# Altium PCB PCB1.pcbdoc (part 1 of 2)
Units mm, origin at the board's own origin, x right, y up, seen from the top; angles counter-clockwise.
Board outline 133.86 x 88.2 mm, 2 copper layers (Top Layer, Bottom Layer), stack 0.07 mm thick; 75 components, 73 nets, 338 pads, 350 vias.
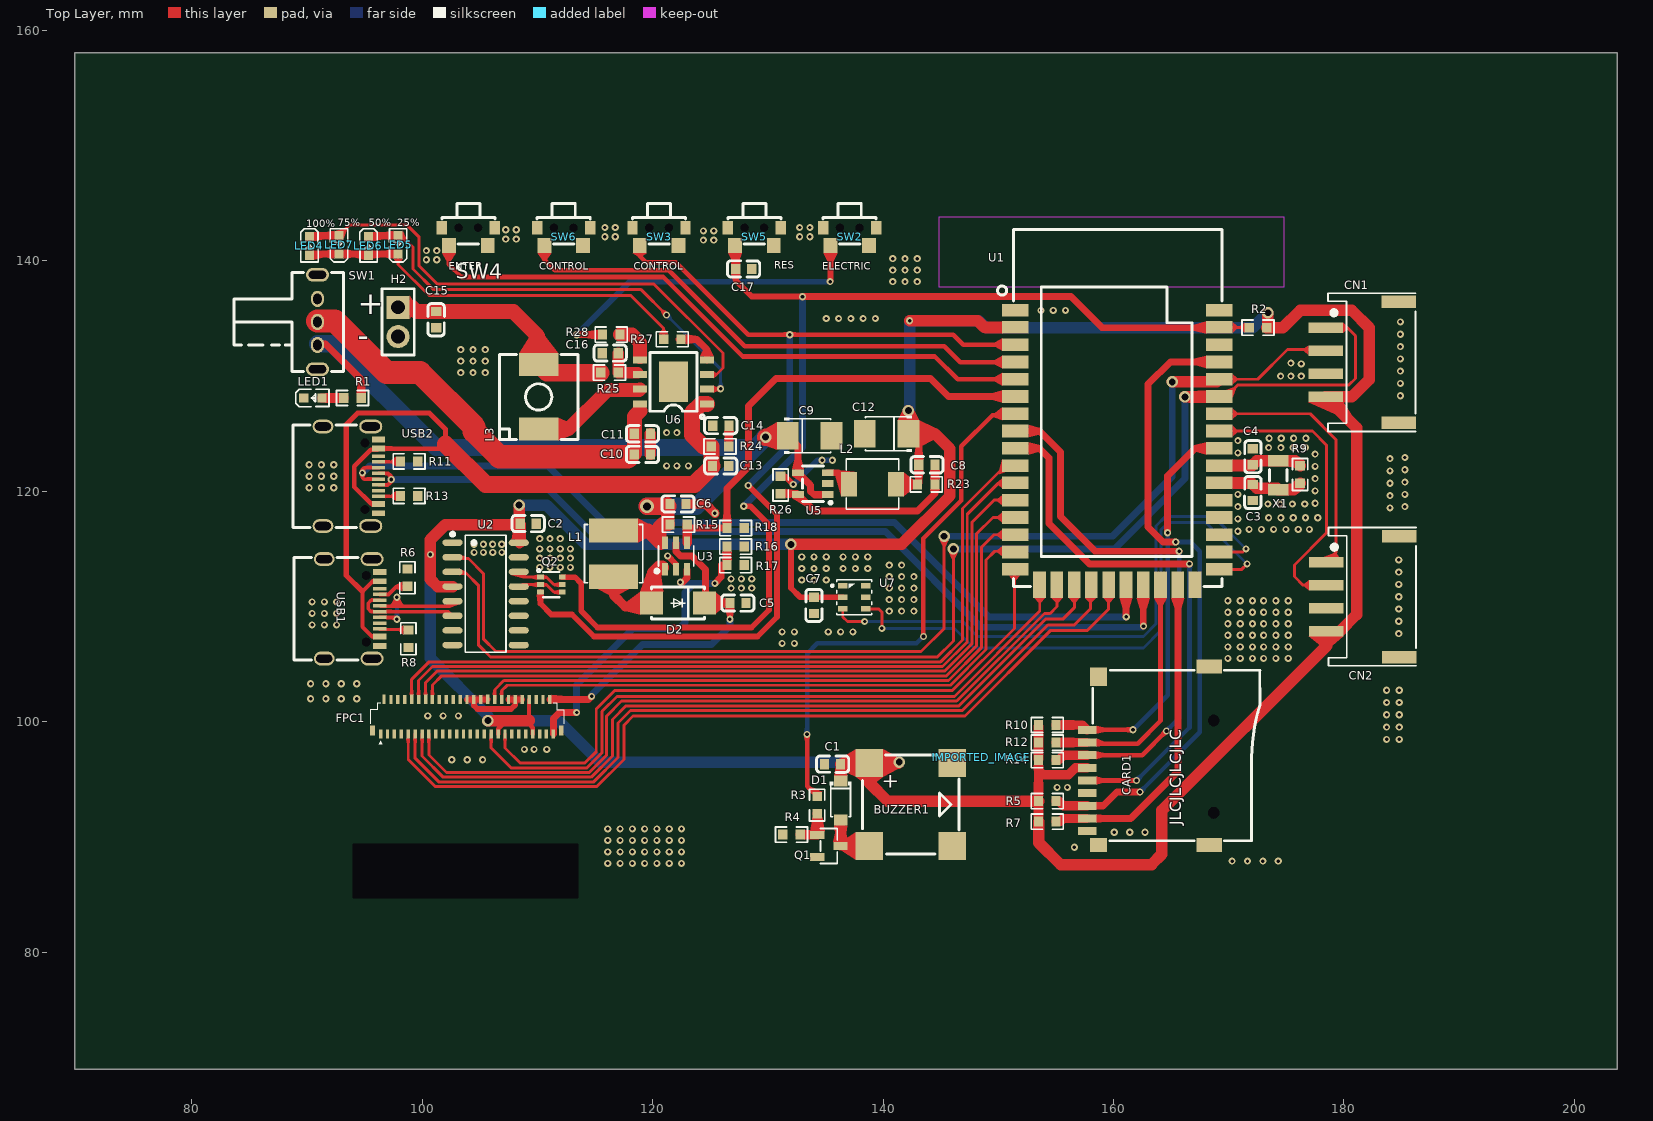
[diagram p0: Top Layer view]
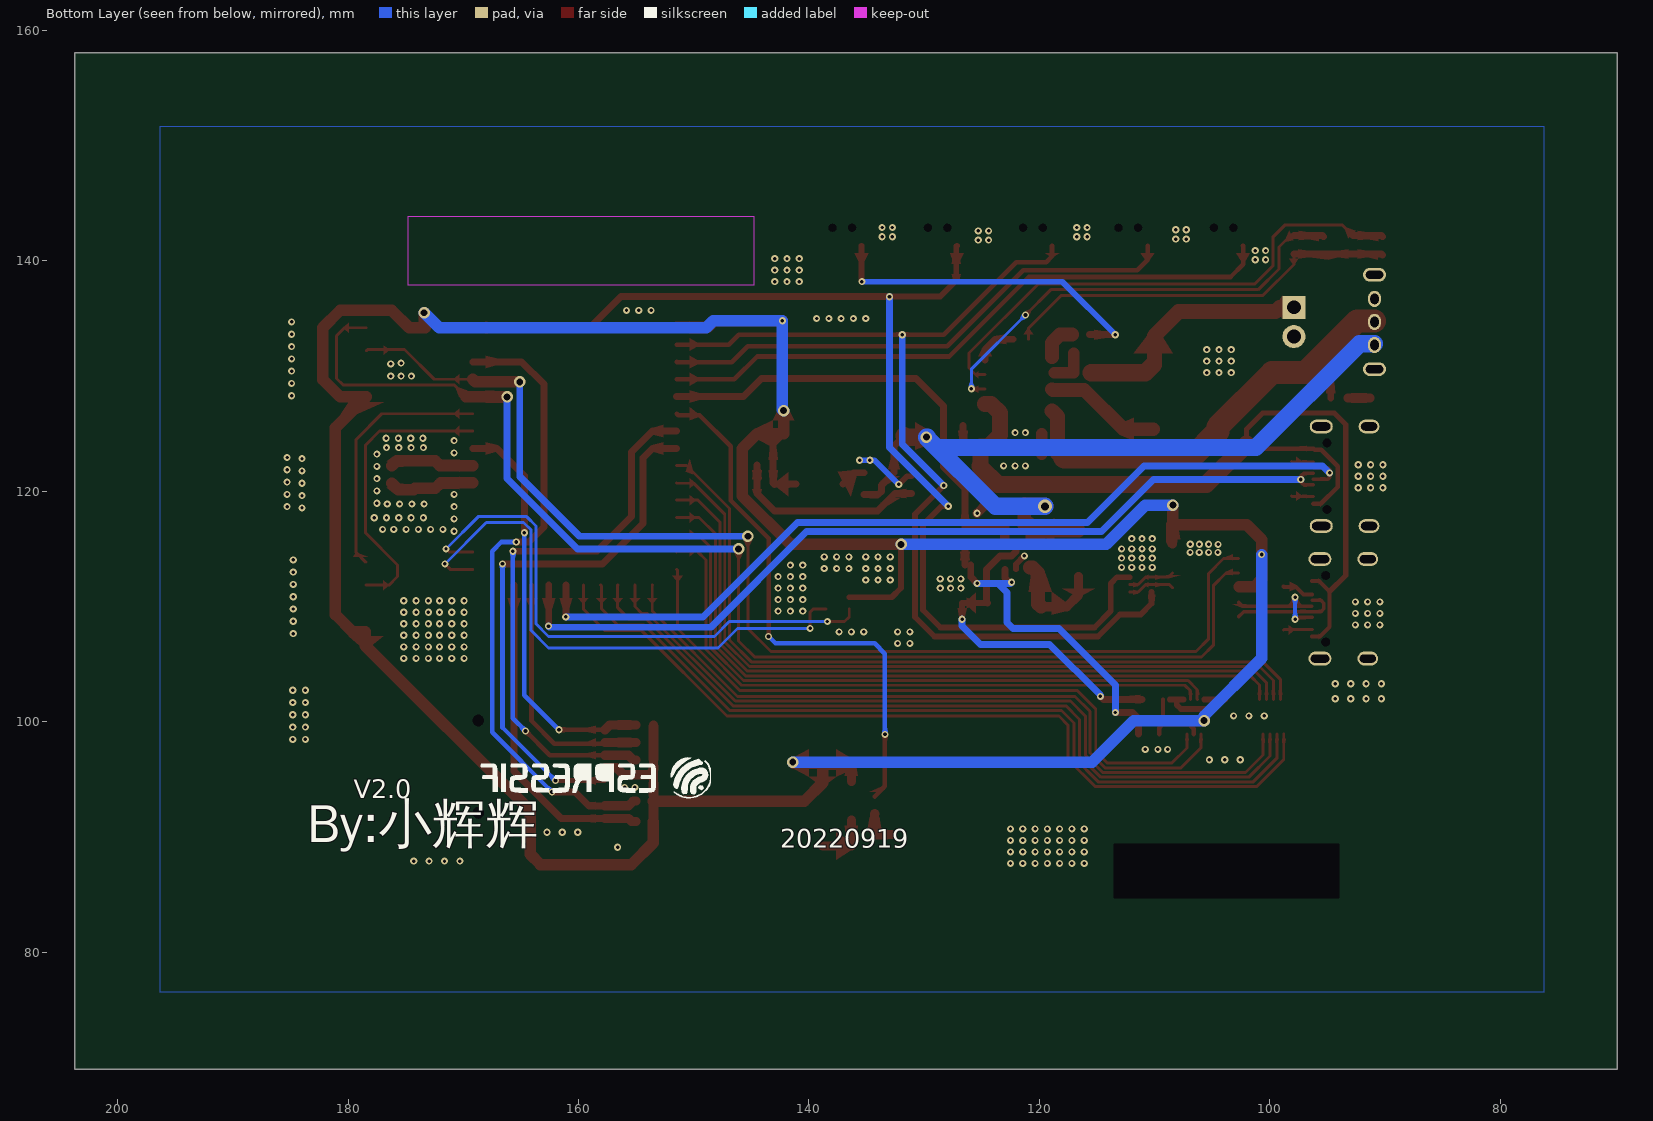
[diagram p1: Bottom Layer view, seen from below]

## Layer stack, top to bottom
Top Layer: signal copper 0.035
Bottom Layer: signal copper 0.035

## Board outline
203.707,69.85 69.85,69.85 69.85,158.049 203.707,158.049
cut-out: 93.973,84.689 113.531,84.689 113.531,89.388 93.973,89.388

## Components (designator, comment, footprint, x,y, rotation, side; value= is the part's Value field where it differs from the comment)
BUZZER1 "MLT-8530" BUZ-SMD_4P-L8.5-W8.5-P8.50-TL 142.403,92.811 r0 top
C1 "CL10A105KO8NNNC" C0603 135.613,96.322 r180 top
C2 "CAP_0603" C0603 109.199,117.2 r0 top
C3 "CAP_0603" C0603 172.099,119.9 r90 top
C4 "CAP_0603" C0603 172.099,123 r270 top
C5 "CL10A105KO8NNNC" C0603 127.399,110.3 r0 top
C6 "CL10A105KO8NNNC" C0603 122.199,118.9 r0 top
C7 "CAP_0603" C0603 133.999,110.1 r90 top
C8 "cc0603jrnpo9bn220" C0603 143.799,122.3 r180 top
C9 "TAJB226K016RNJ" CAP-SMD_L3.5-W2.8-R-RD 133.621,124.816 r180 top
C10 "CL10A105KO8NNNC" C0603 119.099,123.2 r180 top
C11 "CL10A105KO8NNNC" C0603 119.101,124.993 r180 top
C12 "TAJB226K016RNJ" CAP-SMD_L3.5-W2.8-R-RD 140.299,125 r0 top
C13 "CL10A105KO8NNNC" C0603 125.899,122.2 r180 top
C14 "CL10A105KO8NNNC" C0603 125.914,125.7 r0 top
C15 "CL10A105KO8NNNC" C0603 101.199,134.9 r90 top
C16 "CL10A105KO8NNNC" C0603 116.317,132 r0 top
C17 "0603B104K500NT" C0603 127.899,139.3 r0 top
CARD1 "tf-115-bcp9" TF-SMD_TF-115-BCP9 163.005,97.047 r90 top
CN1 "PH-4P卧贴" CONN-SMD_PH2.0-4PWB 181.599,131.2 r270 top
CN2 "PH-4P卧贴" CONN-SMD_PH2.0-4PWB 181.638,110.851 r270 top
D1 "1N4148W" SOD-123_L2.8-W1.8-LS3.7-RD 136.313,93.147 r270 top
D2 "SS34" DO-214AC_L4.3-W2.7-LS5.3-RD 122.199,110.3 r180 top
FPC1 "FH26W-51S-0.3SHW(60)" FPC-SMD_FH26W-51S-0.3SHW-60 103.879,100.437 r0 top
H2 "HDR-F_2.54_1x2P" HDR-TH_2P-P2.54-V-F 97.899,134.7 r270 top
IMPORTED_IMAGE "IMPORTED_IMAGE" IMPORTED_IMAGE 148.499,96.9 r0 top
L1 "SWPA5040S220MT" IND-SMD_L5.0-W5.0 116.599,114.6 r270 top
L2 "SLO0420H2R2MTT" IND-SMD_L4.4-W4.2 139.082,120.625 r0 top
L3 "SPM6530T-1R0M120" IND-SMD_L7.1-W6.5-P5.60 110.101,128.193 r90 top
LED1 "LED_0603-R" LED0603-RD_BLUE 90.503,128.097 r0 top
LED4 "100%" LED0603-RD_BLUE 90.199,141.3 r270 top
LED5 "25%" LED0603-RD_BLUE 97.899,141.399 r90 top
LED6 "50%" LED0603-RD_BLUE 95.326,141.3 r270 top
LED7 "75%" LED0603-RD_BLUE 92.772,141.399 r90 top
Q1 "AO3400" SOT-23-3_L2.9-W1.3-P1.90-LS2.4-BR 135.297,89.21 r180 top
Q2 "UMH3N" SC-70-6_L2.2-W1.3-P0.65-LS2.1-BR 111.199,111.9 r180 top
R1 "Res_0603" R0603 93.946,128.1 r0 top
R2 "Res_0603" R0603 172.546,134.2 r0 top
R3 "RC0603FR-07100RL" R0603 134.281,92.757 r270 top
R4 "RC0603FR-0710KL_1" R0603 132.046,90.2 r0 top
R5 "0603waf1002t5e" R0603 154.251,93.11 r0 top
R6 "td03g5101bt" R0603 98.699,112.5 r270 top
R7 "0603waf1002t5e" R0603 154.251,91.332 r0 top
R8 "td03g5101bt" R0603 98.799,107.2 r90 top
R9 "0603WAJ0515T5E" R0603 176.199,121.453 r270 top
R10 "0603waf1002t5e" R0603 154.251,99.714 r0 top
R11 "td03g5101bt" R0603 98.852,122.6 r180 top
R12 "0603waf1002t5e" R0603 154.251,98.19 r0 top
R13 "td03g5101bt" R0603 98.852,119.6 r180 top
R14 "0603waf1002t5e" R0603 154.251,96.666 r0 top
R15 "RC0603FR-0710KL_1" R0603 122.246,117.1 r180 top
R16 "RC0603FR-0710KL_1" R0603 127.199,115.2 r180 top
R17 "RC0603FR-0710KL_1" R0603 127.199,113.6 r180 top
R18 "RC0603FR-0710KL_1" R0603 127.199,116.8 r180 top
R23 "rc0603fr-07100kl" R0603 143.743,120.6 r0 top
R24 "0603waf1002t5e" R0603 125.843,123.9 r180 top
R25 "0603waf1002t5e" R0603 116.246,130.3 r0 top
R26 "0603waf2212t5e" R0603 131.099,120.553 r270 top
R27 "0603waf1002t5e" R0603 121.699,133.2 r180 top
R28 "0603waf1002t5e" R0603 116.399,133.6 r180 top
SW1 "SK-12D02-VG5" SW-TH_SK-12D02-VG5 90.899,134.699 r270 top
SW2 "TS24CA" SW-SMD_TS24CA 137.099,142.1 r0 top
SW3 "TS24CA" SW-SMD_TS24CA 120.549,142.1 r0 top
SW4 "TS24CA" SW-SMD_TS24CA 103.999,142.1 r0 top
SW5 "TS24CA" SW-SMD_TS24CA 128.824,142.1 r0 top
SW6 "TS24CA" SW-SMD_TS24CA 112.274,142.1 r0 top
U1 "ESP-S3-12K" WIFIM-SMD_42P-L31.0-W18.0-P1.50 160.33,123.805 r0 top
U2 "CH340C" SOP-16_L10.0-W3.9-P1.27-LS6.0-BL 105.499,111.1 r270 top
U3 "RY3730" SOT-23-6_L2.9-W1.6-P0.95-LS2.8-BL 122.032,114.374 r0 top
U5 "sy8088aac" SOT-23-5_L3.0-W1.7-P0.95-LS2.8-BR 133.911,120.663 r0 top
U6 "IP5306" ESOP-8_L4.9-W3.9-P1.27-LS6.0-BL-EP 121.799,129.5 r90 top
U7 "AHT20" SENSOR-SMD_L3.0-W3.0-P1.00-BR 137.499,110.8 r180 top
USB1 "TYPE-C-2.0-16PIN-SMT-3" TYPE-C-SMD_TYPE-CF3.1 93.899,109.8 r270 top
USB2 "TYPE-C-2.0-16PIN-SMT-3" TYPE-C-SMD_TYPE-CF3.1 93.787,121.307 r270 top
X1 "Q13FC1350000400" FC-135R_L3.2-W1.5 174.299,121.4 r270 top

## Footprints (in the part's own frame and the unit in brackets; to place one, negate y for a bottom-side part, rotate by r counter-clockwise, add the part's x,y. Pads: shape width x height; smd on the part's side, far side on the other; paste and mask are expansions set on the pad)
BUZ-SMD_4P-L8.5-W8.5-P8.50-TL [mm]
  rect 2.4x2.4 smd: 1(-3.6,3.6) 2(-3.6,-3.6) 3(3.6,-3.6) 4(3.6,3.6)
  silkscreen extent -4.2,-4.3 4.2,4.3
C0603 [mm]
  rect 0.8x0.9 smd: 1(-0.7,0) 2(0.7,0)
  silkscreen extent -1.41,-0.71 1.39,0.72
CAP-SMD_L3.5-W2.8-R-RD [mil]
  rect 74.8x93.5 smd: 1(74.8,0) 2(-74.7,0)
  silkscreen extent -72,-61 87,61
CONN-SMD_PH2.0-4PWB [mm]
  rect 0.899x3 smd: 1(-3,-3.175) 2(-1.001,-3.175) 3(1.001,-3.175) 4(3,-3.175)
  rect 1.1x3 smd: 5(5.25,3.175) 6(-5.25,3.175)
  silkscreen extent -6,-2.98 6,4.62
DO-214AC_L4.3-W2.7-LS5.3-RD [mil]
  rect 78.7x78.7 smd: 1(-90.5,0) 2(90.6,0)
  silkscreen extent -90,-55 91,55
ESOP-8_L4.9-W3.9-P1.27-LS6.0-BL-EP [mm]
  rect 0.6x1.2 smd: 1(-1.905,-2.908) 2(-0.635,-2.908) 3(0.635,-2.908) 4(1.905,-2.908) 5(1.905,2.908) 6(0.635,2.908) 7(-0.635,2.908) 8(-1.905,2.908)
  rect 3.5x2.5 smd: 9(0,0)
  silkscreen extent -3.2,-2.67 2.55,2.05
FC-135R_L3.2-W1.5 [mm]
  rect 1.001x1.801 smd: 1(-1.25,0) 2(1.25,0)
  silkscreen extent -0.51,-0.76 0.51,0.76
FPC-SMD_FH26W-51S-0.3SHW-60 [mil]
  rect 11.8x31.5 smd: 1(-295.3,-59.1) 2(-283.6,59.2) 3(-271.7,-59.2) 4(-259.8,59.1) 5(-248.1,-59.1) 6(-236.2,59.1) 7(-224.5,-59.1) 8(-212.6,59.1) 9(-200.9,-59.1) 10(-189,59.2) 11(-177.2,-59.1) 12(-165.3,59.1) 13(-153.6,-59.1) 14(-141.7,59.2) 15(-130,-59.2) 16(-118.1,59.1) 17(-106.4,-59.1) 18(-94.5,59.1) 19(-82.8,-59.2) 20(-70.8,59.1) 21(-59.2,-59.1) 22(-47.2,59.1) 23(-35.5,-59.1) 24(-23.6,59.1) 25(-11.9,-59.1) 26(0,59.1) 27(11.7,-59.1) 28(23.7,59.1) 29(35.4,-59.1) 30(47.3,59.1) 31(59,-59.1) 32(70.9,59.2) 33(82.6,-59.1) 34(94.5,59.1) 35(106.2,-59.1) 36(118.1,59.1) 37(129.8,-59.1) 38(141.8,59.1) 39(153.5,-59.1) 40(165.3,59.1) 41(177.2,-59.1) 42(189,59.1) 43(200.8,-59.1) 44(212.6,59.1) 45(224.4,-59.1) 46(236.2,59.1) 47(248,-59.1) 48(259.8,59.1) 49(271.6,-59.1) 50(283.5,59.1) 51(295.3,-59.1)
  rect 15.7x35.4 smd: 52(322.8,-47.1) 53(-322.8,-47.1)
  silkscreen extent -331,-94 331,47
HDR-TH_2P-P2.54-V-F [mm]
  rect 1.999x1.999 hole 1.199: 1(-1.27,0)
  round 1.999 hole 1.199: 2(1.27,0)
  silkscreen extent -2.88,-1.39 2.88,1.4
IMPORTED_IMAGE [mm]
IND-SMD_L4.4-W4.2 [mil]
  rect 55.1x83.5 smd: 1(79.8,0) 2(-79.8,0)
  silkscreen extent -90,-86 90,86
IND-SMD_L5.0-W5.0 [mm]
  rect 2.123x4.219 smd: 1(1.999,0) 2(-1.999,0)
  silkscreen extent -2.53,-2.53 2.53,2.53
IND-SMD_L7.1-W6.5-P5.60 [mm]
  rect 1.999x3.401 smd: 1(-2.799,0) 2(2.799,0)
  silkscreen extent -3.7,-3.4 3.7,3.4
LED0603-RD_BLUE [mil]
  rect 31.5x31.5 smd: 1(-31.5,-0.1) 2(31.5,0.1)
  silkscreen extent -59,-29 55,30
R0603 [mm]
  rect 0.806x0.864 smd: 1(-0.753,0) 2(0.753,0)
  silkscreen extent -1.39,-0.66 1.39,0.66
SC-70-6_L2.2-W1.3-P0.65-LS2.1-BR [mm]
  rect 0.6x0.42 smd: 1(0.95,-0.65) 2(0.95,0) 3(0.95,0.65) 4(-0.95,0.65) 5(-0.95,0) 6(-0.95,-0.65)
  silkscreen extent -0.7,-1.34 1.22,1.1
SENSOR-SMD_L3.0-W3.0-P1.00-BR [mm]
  rect 0.8x0.5 smd: 1(1,-1) 2(1,0) 3(1,1) 4(-1,1) 5(-1,0) 6(-1,-1)
  silkscreen extent -1.52,-1.52 2,1.52
SOD-123_L2.8-W1.8-LS3.7-RD [mm]
  rect 0.95x1.15 smd: 1(-1.692,0) 2(1.692,0)
  silkscreen extent -1.63,-0.94 1.41,0.94
SOP-16_L10.0-W3.9-P1.27-LS6.0-BL [mm]
  oval 0.56x1.745 smd: 1(-4.445,-2.872) 2(-3.175,-2.872) 3(-1.905,-2.872) 4(-0.635,-2.872) 5(0.635,-2.872) 6(1.905,-2.872) 7(3.175,-2.872) 8(4.445,-2.872) 9(4.445,2.872) 10(3.175,2.872) 11(1.905,2.872) 12(0.635,2.872) 13(-0.635,2.872) 14(-1.905,2.872) 15(-3.175,2.872) 16(-4.445,2.872)
  silkscreen extent -5.33,-3.02 5.08,1.77
SOT-23-3_L2.9-W1.3-P1.90-LS2.4-BR [mm]
  rect 1.25x0.7 smd: 1(1,-0.95) 2(1,0.95) 3(-1,0)
  silkscreen extent -0.73,-1.53 0.73,1.53
SOT-23-5_L3.0-W1.7-P0.95-LS2.8-BR [mm]
  rect 1x0.6 smd: 1(1.3,-0.95) 2(1.3,0) 3(1.3,0.95) 4(-1.3,0.95) 5(-1.3,-0.95)
  silkscreen extent -0.9,-1.78 1.65,1.55
SOT-23-6_L2.9-W1.6-P0.95-LS2.8-BL [mm]
  rect 0.532x1.072 smd: 1(-0.95,-1.149) 2(0,-1.149) 3(0.95,-1.149) 4(0.95,1.149) 5(0,1.149) 6(-0.95,1.149)
  silkscreen extent -1.82,-1.45 1.54,0.89
SW-SMD_TS24CA [mil]
  rect 35.4x47.2 smd: 1(-90.5,30.5) 2(90.6,30.5)
  rect 47.2x51.2 smd: 3(-65.9,-30.5) 4(66,-30.5)
  Multi-Layer board cut-out: -19.7,30.5 -21.07,36.49 -24.9,41.29 -30.43,43.95 -36.57,43.95 -42.1,41.29 -45.93,36.49 -47.3,30.5 -47.3,30.5 -45.93,24.51 -42.1,19.71 -36.57,17.05 -30.43,17.05 -24.9,19.71 -21.07,24.51 -19.7,30.5
  Multi-Layer board cut-out: 47.3,30.5 45.93,36.49 42.1,41.29 36.57,43.95 30.43,43.95 24.9,41.29 21.07,36.49 19.7,30.5 19.7,30.5 21.07,24.51 24.9,19.71 30.43,17.05 36.57,17.05 42.1,19.71 45.93,24.51 47.3,30.5
  silkscreen extent -91,-25 91,113
SW-TH_SK-12D02-VG5 [mm]
  oval 1.4x1.1 hole 0.701 slot 0.899 at 0 deg: 1(-1.999,0) 2(0,0) 3(1.999,0)
  oval 1.199x1.999 hole 0.701 slot 1.501 at 90 deg: 4(4.1,0) 5(-4.1,0)
  silkscreen extent -4.3,-7.25 4.3,2.27
TF-SMD_TF-115-BCP9 [mil]
  rect 27.6x63 smd: 1(88.6,208.7) 2(45.3,208.7) 3(2,208.7) 4(-41.3,208.7) 5(-84.6,208.7) 6(-128,208.7) 7(-171.3,208.7) 8(-214.6,208.7) 9(-257.9,208.7)
  rect 47.2x59.1 smd: 10(-305.1,169.3)
  rect 47.2x86.6 smd: 11(-305.1,-208.7) 13(305.1,-208.7)
  rect 63x59.1 smd: 12(269.7,169.3)
  Multi-Layer board cut-out: -194.9,-244.1 -186.35,-242.15 -179.5,-236.68 -175.69,-228.78 -175.69,-220.02 -179.5,-212.12 -186.35,-206.65 -194.9,-204.7 -194.9,-204.7 -203.45,-206.65 -210.3,-212.12 -214.11,-220.02 -214.11,-228.78 -210.3,-236.68 -203.45,-242.15 -194.9,-244.1
  Multi-Layer board cut-out: 120.1,-244.1 128.65,-242.15 135.5,-236.68 139.31,-228.78 139.31,-220.02 135.5,-212.12 128.65,-206.65 120.1,-204.7 120.1,-204.7 111.55,-206.65 104.7,-212.12 100.89,-220.02 100.89,-228.78 104.7,-236.68 111.55,-242.15 120.1,-244.1
  silkscreen extent -291,-382 292,189
TYPE-C-SMD_TYPE-CF3.1 [mm]
  oval 1.2x2 hole 0.7 slot 1.6 at 90 deg: 1(-4.32,1.737) 1(4.32,1.737)
  oval 1.2x1.8 hole 0.7 slot 1.4 at 90 deg: 1(-4.32,-2.413) 1(4.32,-2.413)
  rect 0.5x1.15 smd: A1(-3.2,2.413) A2(-2.4,2.413) A11(2.4,2.413) A12(3.218,2.413)
  rect 0.3x1.15 smd: A3(-1.75,2.413) A4(-1.25,2.413) A5(-0.75,2.413) A6(-0.25,2.413) A7(0.25,2.413) A8(0.75,2.413) A9(1.25,2.413) A10(1.75,2.413)
  Multi-Layer board cut-out: 2.89,1.612 2.727,1.575 2.597,1.471 2.524,1.321 2.524,1.154 2.597,1.004 2.727,0.899 2.89,0.862 2.89,0.862 3.053,0.899 3.183,1.004 3.256,1.154 3.256,1.321 3.183,1.471 3.053,1.575 2.89,1.612
  Multi-Layer board cut-out: -2.89,1.612 -3.053,1.575 -3.183,1.471 -3.256,1.321 -3.256,1.154 -3.183,1.004 -3.053,0.899 -2.89,0.862 -2.89,0.862 -2.727,0.899 -2.597,1.004 -2.524,1.154 -2.524,1.321 -2.597,1.471 -2.727,1.575 -2.89,1.612
  silkscreen extent -4.44,-5.03 4.45,0.52
WIFIM-SMD_42P-L31.0-W18.0-P1.50 [mm]
  rect 2.3x1.1 smd: 1(-8.85,11.925) 2(-8.85,10.425) 3(-8.85,8.925) 4(-8.85,7.425) 5(-8.85,5.925) 6(-8.85,4.425) 7(-8.85,2.925) 8(-8.85,1.425) 9(-8.85,-0.075) 10(-8.85,-1.575) 11(-8.85,-3.075) 12(-8.85,-4.575) 13(-8.85,-6.075) 14(-8.85,-7.575) 15(-8.85,-9.075) 16(-8.85,-10.575) 27(8.85,-10.575) 28(8.85,-9.075) 29(8.85,-7.575) 30(8.85,-6.075) 31(8.85,-4.575) 32(8.85,-3.075) 33(8.85,-1.575) 34(8.85,-0.075) 35(8.85,1.425) 36(8.85,2.925) 37(8.85,4.425) 38(8.85,5.925) 39(8.85,7.425) 40(8.85,8.925) 41(8.85,10.425) 42(8.85,11.925)
  rect 1.1x2.3 smd: 17(-6.75,-11.925) 18(-5.25,-11.925) 19(-3.75,-11.925) 20(-2.25,-11.925) 21(-0.75,-11.925) 22(0.75,-11.925) 23(2.25,-11.925) 24(3.75,-11.925) 25(5.25,-11.925) 26(6.75,-11.925)
  silkscreen extent -10.4,-12.08 9.1,18.93

## Via types
v1: diameter 0.62, hole 0.3, Top Layer to Bottom Layer, 295 vias
v2: diameter 0.62, hole 0.32, Top Layer to Bottom Layer, 15 vias
v3: diameter 0.63, hole 0.3, Top Layer to Bottom Layer, 14 vias
v4: diameter 0.63, hole 0.32, Top Layer to Bottom Layer, 12 vias
v5: diameter 1, hole 0.6, Top Layer to Bottom Layer, 11 vias
v6: diameter 0.62, hole 0.305, Top Layer to Bottom Layer, 2 vias
v7: diameter 1.2, hole 0.7, Top Layer to Bottom Layer, 1 vias

## Nets (pads, with @x,y where several pads share a name; then routed paths per layer and width w, separated by ;. In a path a pad name is that pad's centre, name@x,y a point inside that pad or via, vN(x,y) a via of type N, cw(c..) or ccw(c..) an arc to the next point about the centre after c; other vN are vias at no path point)
$1N5106: LED1.2 R1.1 | length 1.9
  Top Layer w0.8: LED1.2@91.303,128.1 R1.1@93.192,128.1
$1N25025: Q1.1 R3.2 R4.2 | length 3.4
  Top Layer w0.8: R4.2@132.799,90.2 134.257,90.2 Q1.1@134.297,90.16 134.297,91.988 R3.2@134.281,92.004
$1N25027: BUZZER1.2 D1.2 Q1.3 | length 4.8
  Top Layer w0.8: D1.2@136.313,91.454 136.313,89.226 Q1.3@136.297,89.21 BUZZER1.2@138.803,89.211
$1N31228: D2.2 L1.1 U3.1 | length 9.2
  Top Layer w0.8: L1.1@116.599,112.601 116.599,111 117.615,109.984 D2.2@119.864,109.984
  Top Layer w1.2: D2.2@119.864,109.984 120.099,110.218 120.099,112.9 120.599,113.4 120.799,113.4
$1N88053: C14.2 R24.1 | length 1.8
  Top Layer w0.6: R24.1@126.597,123.9 126.615,123.918 C14.2@126.615,125.7
$1N92749: LED4.2 LED5.1 LED6.2 LED7.1 R27.2 | length 34.9
  Top Layer w0.254: LED5.1@97.902,140.599 97.902,139.697 100.599,137 118.099,137 120.946,134.153 R27.2@120.946,133.2
  Top Layer w0.6: LED4.2@90.202,140.5 90.301,140.599 LED7.1@92.775,140.599 LED5.1@97.902,140.599
$1N103155: LED5.2 LED6.1 U6.2 | length 39.4
  Top Layer w0.254: LED5.2@97.896,142.199 98.2,142.199 99.199,141.2 99.199,139.3 100.999,137.5 118.999,137.5 v2(121.199,135.3) ; U6.2@124.707,128.865 125.864,128.865 v2(125.899,128.9)
  Top Layer w0.6: LED6.1@95.323,142.1 95.422,142.199 LED5.2@97.896,142.199
  Bottom Layer w0.254: v2(121.199,135.3) 125.899,130.6 v2(125.899,128.9)
$1N106824: R27.1 U6.4 | length 3.7
  Top Layer w0.6: R27.1@122.299,133.2 123.799,133.2 124.707,132.291 U6.4@124.707,131.405
$1N108049: LED4.1 LED7.2 U6.3 | length 45.3
  Top Layer w0.254: LED7.2@92.77,142.199 93.671,143.1 98.699,143.1 99.699,142.1 99.699,139.6 101.293,138.006 120.093,138.006 126.099,132 126.099,130.7 125.534,130.135 U6.3@124.707,130.135
  Top Layer w0.6: LED4.1@90.196,142.1 90.295,142.199 LED7.2@92.77,142.199
$1N108197: R28.1 U6.5 | length 3.3
  Top Layer w1.2: R28.1@117.152,133.6 118.199,133.6 118.899,132.9 U6.5@118.899,131.64
$1N108835: R28.2 SW2.3 | length 29.3
  Top Layer w0.5: v1(135.399,138.2) 135.425,138.226 SW2.3@135.425,141.325
  Top Layer w0.6: v4(113.399,133.6) R28.2@115.646,133.6
  Bottom Layer w0.5: v4(113.399,133.6) 117.999,138.2 v1(135.399,138.2)
$1N110867: C16.2 R25.2 U6.6 | length 3.4
  Top Layer w1: C16.2@117.017,132 117.017,130.318 R25.2@116.999,130.3 U6.6@118.719,130.3
$1N120907: L3.1 U6.7 | length 10.2
  Top Layer w1.2: L3.1@110.101,125.394 112.693,125.394 116.099,128.8 118.826,128.8 U6.7@118.891,128.865
ACC1: R6.2 USB1.A4 | length 2.8
  Top Layer w0.35: USB1.A4@96.312,111.05 97.049,111.05 97.699,111.7 98.752,111.7 R6.2@98.799,111.746
ACC2: R8.2 USB1.A10 | length 2.5
  Top Layer w0.254: USB1.A10@96.287,107.996 98.756,107.996 R8.2@98.799,107.953
BAT+: C15.2 H2.1 L3.2 R25.1 | length 21.2
  Top Layer w1.3: H2.1@97.899,135.97 99.129,135.97 99.499,135.6 C15.2@101.199,135.6 107.899,135.6 109.999,133.5 L3.2@109.999,131.094
  Top Layer w1.5: L3.2@110.101,130.992 110.793,130.3 R25.1@115.492,130.3
BAT_5V: C10.2 C11.2 SW1.2 U6.8 | length 35.9
  Top Layer w1.3: C10.2@118.401,123.293 C11.2@118.401,124.993 118.401,126.501 118.891,126.991
  Top Layer w2: SW1.2@90.899,134.8 92.399,134.8 96.899,130.3 99.799,130.3 104.499,125.6 104.499,125.2 106.699,123 117.799,123
BCC1: R11.2 USB2.A4 | length 1.9
  Top Layer w0.254: USB2.A4@96.199,122.557 98.057,122.557 R11.2@98.099,122.6
BCC2: R13.2 USB2.A10 | length 1.9
  Top Layer w0.254: USB2.A10@96.199,119.557 98.057,119.557 R13.2@98.099,119.6
BUZZER: R3.1 U1.7 | length 47.2
  Top Layer w0.4: v2(133.399,98.9) 133.399,94.392 R3.1@134.281,93.51 ; v2(143.499,107.4) 143.499,115.9 146.799,119.2 146.799,123.9 149.499,126.6 151.35,126.6 U1.7@151.48,126.73
  Bottom Layer w0.4: v2(133.399,98.9) 133.399,105.9 134.299,106.8 142.899,106.8 v2(143.499,107.4)
CSX: FPC1.34 U1.14 | length 56.7
  Top Layer w0.254: FPC1.34@106.279,101.938 106.299,101.957 106.299,102.8 107.073,103.574 145.672,103.574 148.525,106.426 148.525,115.125 149.629,116.23 U1.14@151.48,116.23
D+: U1.23 USB2.A6 USB2.A8 | length 77.1
  Top Layer w0.3: USB2.A8@96.199,120.557 97.057,120.557 97.299,120.8 97.299,121.3 97.041,121.557 USB2.A6@96.199,121.557
  Top Layer w0.6: U1.23@162.58,111.88 162.58,108.319 v4(162.599,108.3)
  Bottom Layer w0.6: v2(97.299,121.027) 110.072,121.027 114.599,116.5 140.199,116.5 148.499,108.2 162.499,108.2 v4(162.599,108.3)
D-: U1.22 USB2.A5 USB2.A7 | length 78.4
  Top Layer w0.3: USB2.A7@96.199,121.057 94.942,121.057 94.799,121.2 v2(94.799,121.6) 94.799,121.9 94.956,122.057 USB2.A5@96.199,122.057
  Top Layer w0.6: U1.22@161.08,111.88 161.08,109.119 v4(161.099,109.1)
  Bottom Layer w0.6: v2(94.799,121.6) 95.399,122.2 110.899,122.2 115.799,117.3 140.999,117.3 149.199,109.1 v4(161.099,109.1)
DB0: FPC1.9 U1.21 | length 74.2
  Top Layer w0.254: FPC1.9@98.776,98.935 98.776,96.722 101.125,94.374 115.148,94.374 117.499,96.725 117.499,99.7 118.299,100.5 147.099,100.5 154.499,107.9 157.699,107.9 159.58,109.781 U1.21@159.58,111.88
DB1: FPC1.10 U1.10 | length 68.5
  Top Layer w0.254: FPC1.10@99.078,101.94 99.078,103.679 100.599,105.2 144.999,105.2 146.899,107.1 146.899,118.5 150.629,122.23 U1.10@151.48,122.23
DB2: FPC1.11 U1.20 | length 71.7
  Top Layer w0.254: FPC1.11@99.378,98.935 99.378,96.82 101.418,94.78 114.88,94.78 116.999,96.9 116.999,99.9 118.073,100.974 146.873,100.974 154.299,108.4 156.599,108.4 157.999,109.8 157.999,111.799 U1.20@158.08,111.88
DB3: FPC1.12 U1.11 | length 67
  Top Layer w0.254: FPC1.12@99.68,101.938 99.68,103.581 100.893,104.793 145.167,104.793 147.305,106.931 147.305,118.006 149.999,120.7 151.45,120.7 U1.11@151.48,120.73
DB4: FPC1.13 U1.19 | length 69.2
  Top Layer w0.254: FPC1.13@99.978,98.935 99.978,97.021 101.812,95.187 114.661,95.187 116.499,97.025 116.499,100.2 117.68,101.38 146.58,101.38 154.099,108.9 155.599,108.9 156.599,109.9 156.599,111.861 U1.19@156.58,111.88
DB5: FPC1.14 U1.12 | length 65.4
  Top Layer w0.254: FPC1.14@100.28,101.94 100.28,103.38 101.286,104.387 145.336,104.387 147.712,106.763 147.712,117.312 149.629,119.23 U1.12@151.48,119.23
DB6: FPC1.15 U1.18 | length 66.8
  Top Layer w0.254: FPC1.15@100.577,98.933 100.577,97.122 102.105,95.593 114.493,95.593 116.005,97.106 116.005,100.506 117.286,101.787 146.386,101.787 153.999,109.4 154.499,109.4 155.099,110 155.099,111.861 U1.18@155.08,111.88
DB7: FPC1.16 U1.13 | length 63.6
  Top Layer w0.254: FPC1.16@100.879,101.938 100.879,103.18 101.68,103.98 145.504,103.98 148.118,106.595 148.118,116.319 149.529,117.73 U1.13@151.48,117.73
DCX: FPC1.37 U1.16 | length 58.2
  Top Layer w0.254: FPC1.37@107.176,98.935 107.176,97.723 108.493,96.406 114.105,96.406 115.099,97.4 115.099,101.1 116.699,102.7 145.999,102.7 151.399,108.1 151.399,113.149 U1.16@151.48,113.23
DN: U2.6 USB1.A5 USB1.A7 | length 9.3
  Top Layer w0.3: USB1.A5@96.312,110.549 95.549,110.549 95.299,110.3 95.299,109.8 95.549,109.549 USB1.A7@96.312,109.549 102.249,109.549 102.704,109.095 U2.6@102.704,109.088
DP: U2.5 USB1.A6 USB1.A8 | length 12.1
  Top Layer w0.3: USB1.A8@96.312,109.05 97.649,109.05 v6(97.799,108.9) ; USB1.A6@96.333,110.041 97.308,110.041 ; v6(97.799,110.8) v6@97.799,110.551 ; U2.5@102.704,110.358 102.387,110.041 98.308,110.041 ; 97.308,110.041 v6@97.799,110.532 ; 97.308,110.041 97.793,110.041 ; 97.793,110.041 97.799,110.048 v6@97.799,110.532 ; 97.793,110.041 98.308,110.041 ; v6@97.799,110.532 v6@97.799,110.551 ; v6@97.799,110.551 98.308,110.041
  Bottom Layer w0.35: v6(97.799,108.9) v6(97.799,110.8)
DTR: Q2.2 Q2.4 U2.13 | length 4.1
  Top Layer w0.254: U2.13@108.448,111.628 108.72,111.9 Q2.2@110.249,111.9 110.767,111.9 111.417,111.25 Q2.4@112.149,111.25
EN: C17.1 Q2.6 R2.1 SW5.3 U1.41 | length 101.7
  Top Layer w0.254: U1.41@169.18,134.23 171.762,134.23 R2.1@171.792,134.2
  Top Layer w0.5: Q2.6@112.149,112.55 113.25,112.55 113.799,112 113.799,109.6 115.216,108.182 128.582,108.182 130.099,109.7 130.099,117.1 128.499,118.7 v4(127.899,118.7) ; SW5.3@127.15,141.325 127.199,141.276 C17.1@127.199,139.3 127.199,138.3 128.599,136.9 v4(132.999,136.9)
  Top Layer w0.6: v4(132.999,136.9) 156.299,136.9 158.999,134.2 169.15,134.2 U1.41@169.18,134.23
  Bottom Layer w0.6: v4(127.899,118.7) 132.999,123.8 v4(132.999,136.9)
FB: C8.1 R23.2 R26.2 U5.5 | length 17.1
  Top Layer w0.6: R26.2@131.099,119.8 132.524,119.8 U5.5@132.611,119.713 134.024,118.3 142.999,118.3 144.497,119.797 R23.2@144.497,120.6 144.499,120.602 C8.1@144.499,122.3
GND: BUZZER1.3 BUZZER1.4 C1.2 C2.2 C3.1 C4.1 C5.2 C6.2 C7.1 C9.2 C10.1 C11.1 C12.2 C13.1 C14.1 C15.1 C16.1 C17.2 CARD1.6 CARD1.10 CARD1.11 CARD1.12 CARD1.13 CN1.3 CN1.5 CN1.6 CN2.3 CN2.5 CN2.6 FPC1.3 FPC1.4 FPC1.5 FPC1.6 FPC1.7 FPC1.8 FPC1.17 FPC1.18 FPC1.19 FPC1.20 FPC1.21 FPC1.22 FPC1.23 FPC1.24 FPC1.25 FPC1.26 FPC1.27 FPC1.28 FPC1.29 FPC1.30 FPC1.31 FPC1.32 FPC1.38 FPC1.40 FPC1.41 FPC1.42 FPC1.43 FPC1.52 FPC1.53 H2.2 LED1.1 Q1.2 R4.1 R6.1 R8.1 R11.1 R13.1 R16.1 R17.1 R18.1 R26.1 SW2.4 SW3.1 SW3.2 SW3.4 SW4.1 SW4.2 SW4.4 SW5.1 SW5.2 SW5.4 SW6.1 SW6.2 SW6.4 U1.1 U1.26 U1.42 U2.1 U3.2 U5.2 U6.9 U7.5 USB1.1 USB1.A1 USB1.A12 USB2.1 USB2.A1 USB2.A12 | length 19.6
  Top Layer w0.5: FPC1.26@103.879,101.938 FPC1.28@104.481,101.938 ; FPC1.32@105.68,101.94 105.677,101.938 FPC1.30@105.08,101.938 FPC1.28@104.481,101.938 ; FPC1.38@107.481,101.938 FPC1.40@108.078,101.938 ; FPC1.42@108.68,101.938 FPC1.40@108.078,101.938 ; v1(121.299,114.4) 122.032,113.667 U3.2@122.032,113.225 ; R26.1@131.099,121.306 131.492,121.306 v1(132.199,120.6) ; FPC1.28@104.481,101.938 104.481,101.418 104.799,101.1 107.699,101.1 108.078,101.478 FPC1.40@108.078,101.938
  Top Layer w0.8: C6.2@122.899,118.9 124.599,118.9 v1(125.399,118.1)
  Top Layer w1: C10.1@119.801,123.201 C11.1@119.801,124.993
  Bottom Layer w0.5: v1(132.199,120.6) 134.299,122.7 v1(134.699,122.7) v1(135.599,122.7)
  other v1: 116.099,87.7 117.166,87.7 118.232,87.7 119.299,87.7 120.366,87.7 121.432,87.7 122.499,87.7 170.299,87.9 171.632,87.9 172.966,87.9 174.299,87.9 116.099,88.7 117.166,88.7 118.232,88.7 119.299,88.7 120.366,88.7 121.432,88.7 122.499,88.7 156.599,89.1 116.099,89.7 117.166,89.7 118.232,89.7 119.299,89.7 120.366,89.7 121.432,89.7 122.499,89.7 116.099,90.7 117.166,90.7 118.232,90.7 119.299,90.7 120.366,90.7 121.432,90.7 122.499,90.7 155.099,94.3 155.999,94.3 108.866,97.6 109.699,97.6 110.799,97.6 183.699,98.466 184.799,98.466 183.699,99.533 184.799,99.533 183.699,100.6 184.799,100.6 183.699,101.666 184.799,101.666 183.699,102.733 184.799,102.733 169.932,105.5 170.999,105.5 172.066,105.5 173.032,105.5 174.099,105.5 175.166,105.5 169.932,106.5 170.999,106.5 172.066,106.5 173.032,106.5 174.099,106.5 175.166,106.5 131.232,106.8 132.299,106.8 169.932,107.5 170.999,107.5 172.066,107.5 173.032,107.5 174.099,107.5 175.166,107.5 184.76,107.651 131.232,107.8 132.299,107.8 135.241,107.8 136.307,107.8 137.374,107.8 90.432,108.4 91.499,108.4 92.566,108.4 169.932,108.5 170.999,108.5 172.066,108.5 173.032,108.5 174.099,108.5 175.166,108.5 184.76,108.717 90.432,109.4 91.499,109.4 92.566,109.4 169.932,109.5 170.999,109.5 172.066,109.5 173.032,109.5 174.099,109.5 175.166,109.5 140.532,109.6 141.599,109.6 142.666,109.6 184.76,109.784 90.432,110.4 91.499,110.4 92.566,110.4 169.932,110.5 170.999,110.5 172.066,110.5 173.032,110.5 174.099,110.5 175.166,110.5 140.532,110.6 141.599,110.6 142.666,110.6 184.76,110.851 126.799,111.6 127.699,111.6 128.599,111.6 140.532,111.6 141.599,111.6 142.666,111.6 184.76,111.917 132.932,112.3 133.999,112.3 135.066,112.3 126.799,112.4 127.699,112.4 128.599,112.4 140.532,112.6 141.599,112.6 142.666,112.6 184.76,112.984 132.932,113.3 133.999,113.3 135.066,113.3 136.532,113.3 137.599,113.3 138.666,113.3 110.199,113.4 111.085,113.4 111.97,113.4 112.856,113.4 140.532,113.6 141.599,113.6 184.76,114.051 110.199,114.2 111.085,114.2 111.97,114.2 112.856,114.2 132.932,114.3 133.999,114.3 135.066,114.3 136.532,114.3 137.599,114.3 138.666,114.3 104.489,114.697 105.309,114.702 106.109,114.702 106.909,114.702 110.199,115 111.085,115 111.97,115 112.856,115 104.48,115.395 105.299,115.4 106.099,115.4 106.899,115.4 110.199,115.9 111.085,115.9 111.97,115.9 170.799,116.533 171.766,116.7 172.832,116.7 173.899,116.7 174.966,116.7 176.032,116.7 176.999,116.7 170.799,117.6 173.466,117.7 174.532,117.7 175.599,117.7 176.666,117.7 177.732,117.7 183.999,118.566 170.799,118.666 185.299,118.666 173.399,118.9 174.466,118.9 175.532,118.9 176.599,118.9 177.499,118.966 183.999,119.633 170.799,119.733 185.299,119.733 177.499,120.033 90.178,120.307 91.244,120.307 92.311,120.307 183.999,120.7 185.299,120.8 177.499,121.1 90.178,121.307 91.244,121.307 92.311,121.307 183.999,121.766 185.299,121.866 177.499,122.166 121.199,122.2 122.099,122.2 123.099,122.2 90.178,122.307 91.244,122.307 92.311,122.307 183.999,122.833 185.299,122.933 177.499,123.233 170.799,123.333 173.466,123.8 174.532,123.8 175.599,123.8 176.666,123.8 170.799,124.4 173.499,124.6 174.566,124.6 175.632,124.6 176.699,124.6 121.199,125.1 122.099,125.1 184.899,128.3 184.899,129.366 174.499,130 175.399,130 176.299,130 103.332,130.3 104.399,130.3 105.466,130.3 184.899,130.433 176.299,131.066 175.399,131.133 103.332,131.3 104.399,131.3 105.466,131.3 184.899,131.5 103.332,132.3 104.399,132.3 105.466,132.3 184.899,132.566 184.899,133.633 184.899,134.7 135.066,135 136.132,135 137.199,135 138.266,135 139.332,135 153.699,135.7 154.766,135.7 155.832,135.7 140.832,138.2 141.899,138.2 142.966,138.2 140.832,139.2 141.899,139.2 142.966,139.2 100.349,140.1 101.249,140.1 140.832,140.2 141.899,140.2 142.966,140.2 100.349,140.9 101.249,140.9 124.399,141.8 125.299,141.8 107.249,141.9 108.149,141.9 115.849,142.1 116.749,142.1 132.749,142.1 133.649,142.1 124.399,142.6 125.299,142.6 107.249,142.7 108.149,142.7 115.849,142.9 116.749,142.9 132.749,142.9 133.649,142.9
  other v3: 102.566,96.7 103.899,96.7 105.232,96.7 100.466,100.5 101.799,100.5 103.132,100.5 90.299,102 91.632,102 92.966,102 94.299,102 90.299,103.3 91.632,103.3 92.966,103.3 94.299,103.3
  other v4: 160.066,90.4 161.399,90.4 162.732,90.4
IO0: Q2.3 SW3.3 U1.3 | length 87.2
  Top Layer w0.4: SW3.3@118.875,141.325 118.899,141.301 118.899,140.4 119.399,139.9 121.999,139.9 128.299,133.6 v4(131.899,133.6) 146.099,133.6 146.969,132.73 U1.3@151.48,132.73
  Top Layer w0.5: Q2.3@110.249,111.25 110.249,110.25 111.199,109.3 112.999,109.3 114.899,107.4 129.099,107.4 130.799,109.1 130.799,118 v4(128.299,120.5)
  Bottom Layer w0.6: v4(128.299,120.5) 131.899,124.1 v4(131.899,133.6)
IO4: SW4.3 U1.5 | length 54.9
  Top Layer w0.4: SW4.3@102.325,141.325 102.299,141.299 102.299,139.7 103.399,138.6 120.899,138.6 127.799,131.7 144.499,131.7 146.469,129.73 U1.5@151.48,129.73
IO5: SW6.3 U1.4 | length 45.8
  Top Layer w0.4: SW6.3@110.599,141.324 110.599,140.1 111.499,139.2 121.399,139.2 127.999,132.6 145.299,132.6 146.699,131.2 151.45,131.2 U1.4@151.48,131.23
IO15: C3.2 R9.2 U1.32 X1.2 | length 7.5
  Top Layer w1: U1.32@169.18,120.73 171.969,120.73 C3.2@172.099,120.6 172.447,120.252 174.197,120.252 X1.2@174.299,120.15 175.649,120.15 R9.2@176.199,120.7
IO16: C4.2 R9.1 U1.33 X1.1 | length 7.2
  Top Layer w1: U1.33@169.18,122.23 172.029,122.23 C4.2@172.099,122.3 172.447,122.647 X1.1@174.097,122.647 ; X1.1@174.299,122.649 175.756,122.649 R9.1@176.199,122.206
IO41: CN2.2 U1.35 | length 25.5
  Top Layer w0.254: U1.35@169.18,125.23 177.269,125.23 178.499,124 178.499,116.4 175.699,113.6 175.699,112.6 176.447,111.851 CN2.2@178.463,111.851
IO42: CN2.1 U1.36 | length 22
  Top Layer w0.254: U1.36@169.18,126.73 177.069,126.73 179.299,124.5 179.299,114.686 CN2.1@178.463,113.85
LCD_BLK: R15.1 R18.2 U1.6 U3.4 | length 40.8
  Top Layer w0.6: R15.1@122.999,117.1 123.299,116.8 125.946,116.8 ; R18.2@126.446,116.8 126.446,120.246 128.299,122.1 128.299,127.4 130.699,129.8 144.099,129.8 145.669,128.23 U1.6@151.48,128.23
  Top Layer w0.8: U3.4@122.999,115.54 R15.1@122.999,117.1
LED_PWM: FPC1.1
LEDA: C5.1 D2.1 FPC1.50 U3.5 | length 29.4
  Top Layer w0.5: D2.1@124.498,110.3 C5.1@126.699,110.3 v4(126.699,108.9)
  Top Layer w0.6: FPC1.50@111.08,101.938 114.437,101.938 v1(114.699,102.2) ; U3.5@122.032,115.523 122.032,114.767 122.399,114.4 123.399,114.4 124.599,113.2 124.599,110.401 D2.1@124.498,110.3
  Bottom Layer w0.6: v1(114.699,102.2) 114.699,102.3 119.099,106.7 125.099,106.7 126.699,108.3 v4(126.699,108.9)
LEDK: FPC1.51 R16.2 R17.2 U3.3 | length 29.3
  Top Layer w0.6: FPC1.51@111.38,98.935 111.38,100.28 111.899,100.8 v1(113.399,100.8) ; v1(122.399,112.1) 122.599,112.1 122.981,112.482 U3.3@122.981,113.225 ; v1(125.399,112) 125.946,112.546 125.946,113.6 ; R17.2@126.446,113.6 R16.2@126.446,115.2
  Bottom Layer w0.6: v1(113.399,100.8) 113.399,103.2 118.299,108.1 122.299,108.1 122.799,108.6 122.799,111.2 123.599,112 ; v1(122.399,112.1) 122.499,112 123.599,112 ; v1(125.399,112) 123.599,112
LX: L2.2 U5.3 | length 2.3
  Top Layer w0.6: U5.3@135.212,121.613 136.067,121.613 L2.2@137.055,120.625
RESX: FPC1.33 U1.17 | length 59.6
  Top Layer w0.254: FPC1.33@105.977,98.935 105.977,97.722 107.699,96 114.299,96 115.599,97.3 115.599,100.9 116.893,102.193 146.193,102.193 153.599,109.6 153.599,111.861 U1.17@153.58,111.88